# Altium PCB POVRotor.PcbDoc (part 1 of 2)
Units mm, origin at the board's own origin, x right, y up, seen from the top; angles counter-clockwise.
Board outline 195 x 22.6 mm, 2 copper layers (Top Layer, Bottom Layer); 165 components, 228 nets, 837 pads, 84 vias.
Unrouted connection lines stored in the file: 1.
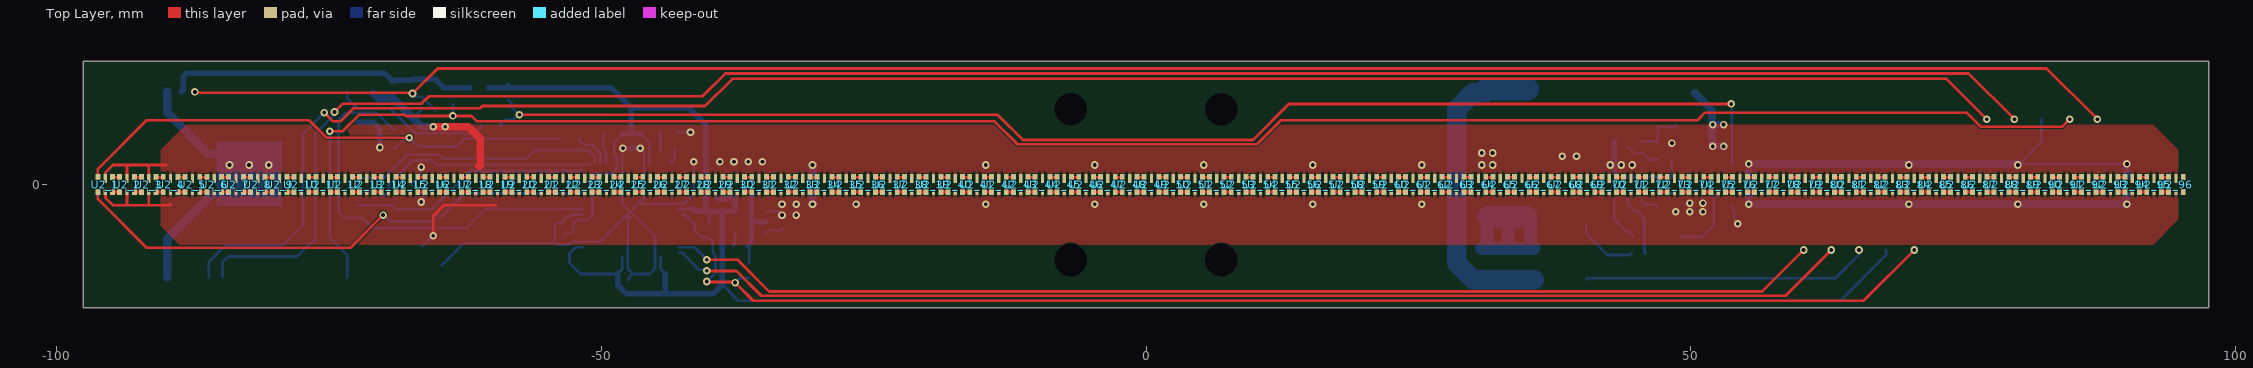
[diagram p0: Top Layer view]
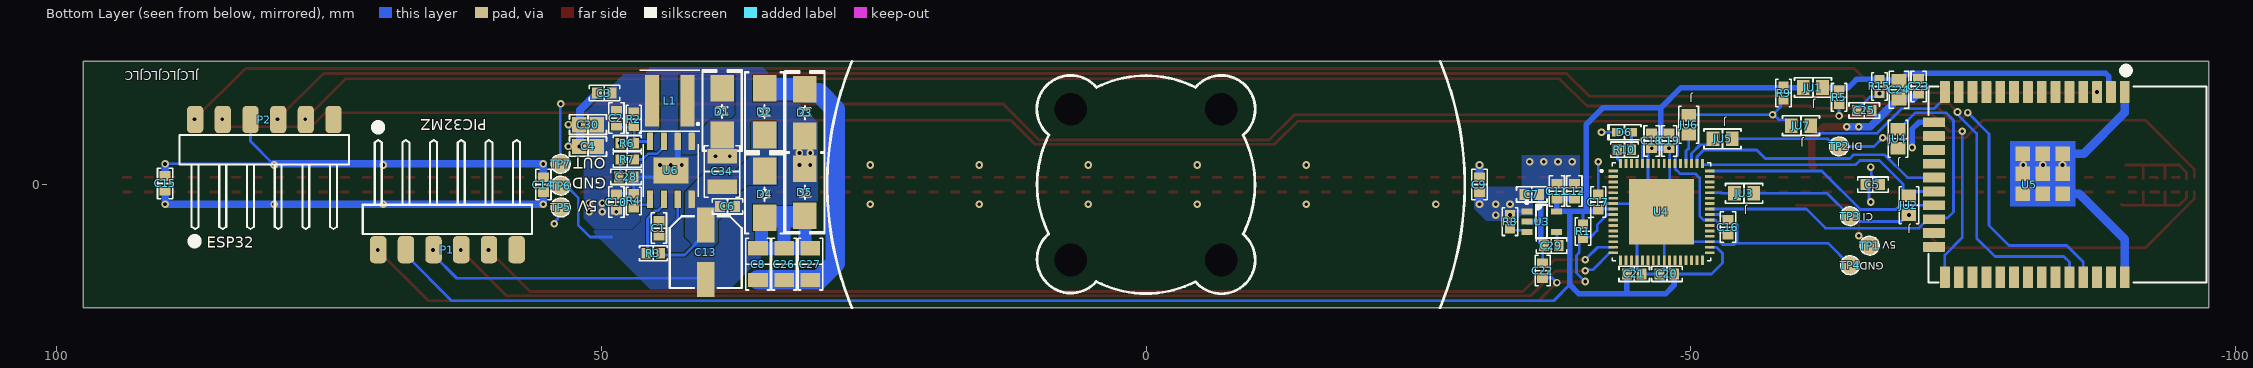
[diagram p1: Bottom Layer view, seen from below]
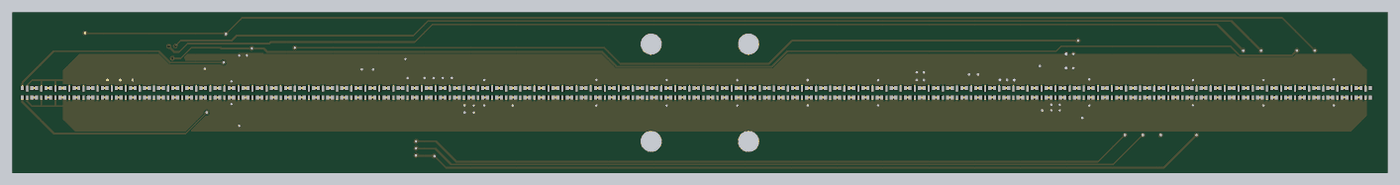
[diagram p3: 3D render of the assembled board from above, using the file's embedded part models]
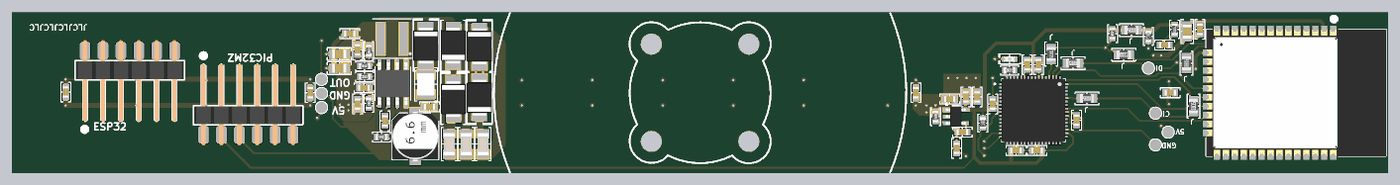
[diagram p4: 3D render of the assembled board from below, using the file's embedded part models]

## Layer stack, top to bottom
Top Solder: solder mask 0.0102, Solder Resist, Dk 3.5
Top Layer: signal copper 0.0356
Dielectric 1: dielectric 0.32, FR-4, Dk 4.8
Bottom Layer: signal copper 0.0356
Bottom Solder: solder mask 0.0102, Solder Resist, Dk 3.5

## Board outline
-97.5,-11.3 97.5,-11.3 97.5,11.3 -97.5,11.3

## Design rules (kind name [scope] priority, off if disabled: settings)
BoardOutlineClearance [All] p1: gap=0.512 ignorepadtopadclearanceinfootprint=FALSE
Clearance [All] p1: gap=0.1 ignorepadtopadclearanceinfootprint=TRUE except(0: Arc-Hole Track-Hole SMDPad-Hole THPad-Hole Via-Hole Fill-Hole Poly-Hole Region-Hole Text-Hole)
PolygonConnect [IsPolygon and not IsNamedPolygon('PolygonDirect')] p1: thpad.connectstyle=Relief thpad.reliefconductorwidth=0.254 thpad.reliefentries=4 thpad.polygonreliefangle="90 Angle" thpad.airgapwidth=0.254 smdpad.connectstyle=Relief smdpad.reliefconductorwidth=0.254 smdpad.reliefentries=4 smdpad.polygonreliefangle="90 Angle" smdpad.airgapwidth=0.254 via.connectstyle=Direct via.reliefconductorwidth=0.254 via.reliefentries=4 via.polygonreliefangle="90 Angle" via.airgapwidth=0.254
PolygonConnect PolygonDirect [(IsNamedPolygon('PolygonDirect'))] p2: connectstyle=Direct reliefconductorwidth=0.254 reliefentries=4 polygonreliefangle="90 Angle" airgapwidth=0.254
RoutingVias [All] p1: holewidth=0.35 width=0.7 viastyle="Through Hole" minholewidth=0.1 minwidth=0.5 maxholewidth=2 maxwidth=2.5
SilkToSilkClearance [All] p1: silktosilkclearance=0.1
SolderMaskExpansion [All] p1: expansion=0.102 istentingtop=FALSE
Width [All] p1: maxlimit=2 minlimit=0.128 preferedwidth=0.254
29 further rules are at their usual default settings.

## Classes and differential pairs
component class U_APA10296: U2_96
component class U_APA10295: U2_95
component class U_APA10294: U2_94
component class U_APA10293: U2_93
component class U_APA10292: U2_92
component class U_APA10291: U2_91
component class U_APA10290: U2_90
component class U_APA10289: U2_89
component class U_APA10288: U2_88
component class U_APA10287: U2_87
component class U_APA10286: U2_86
component class U_APA10285: U2_85
component class U_APA10284: U2_84
component class U_APA10283: U2_83
component class U_APA10282: U2_82
component class U_APA10281: U2_81
component class U_APA10280: U2_80
component class U_APA10279: U2_79
component class U_APA10278: U2_78
component class U_APA10277: U2_77
component class U_APA10276: U2_76
component class U_APA10275: U2_75
channel class APA102: U_APA1021 U_APA1022 U_APA1023 U_APA1024 U_APA1025 U_APA1026 U_APA1027 U_APA1028 U_APA1029 U_APA10210 U_APA10211 U_APA10212 U_APA10213 U_APA10214 U_APA10215 U_APA10216 U_APA10217 U_APA10218 U_APA10219 U_APA10220 U_APA10221 U_APA10222 U_APA10223 U_APA10224 U_APA10225 U_APA10226 U_APA10227 U_APA10228 U_APA10229 U_APA10230 U_APA10231 U_APA10232 U_APA10233 U_APA10234 U_APA10235 U_APA10236 U_APA10237 U_APA10238 U_APA10239 U_APA10240 U_APA10241 U_APA10242 U_APA10243 U_APA10244 U_APA10245 U_APA10246 U_APA10247 U_APA10248 U_APA10249 U_APA10250 U_APA10251 U_APA10252 U_APA10253 U_APA10254 U_APA10255 U_APA10256 U_APA10257 U_APA10258 U_APA10259 U_APA10260 U_APA10261 U_APA10262 U_APA10263 U_APA10264 U_APA10265 U_APA10266 U_APA10267 U_APA10268 U_APA10269 U_APA10270 U_APA10271 U_APA10272 U_APA10273 U_APA10274
component class U_APA10274: U2_74
component class U_APA10273: U2_73
component class U_APA10272: U2_72
component class U_APA10271: U2_71
component class U_APA10270: U2_70
component class U_APA10269: U2_69
component class U_APA10268: U2_68
component class U_APA10267: U2_67
component class U_APA10266: U2_66
component class U_APA10265: U2_65
component class U_APA10264: U2_64
component class U_APA10263: U2_63
component class U_APA10262: U2_62
component class U_APA10261: U2_61
component class U_APA10260: U2_60
component class U_APA10259: U2_59
component class U_APA10258: U2_58
component class U_APA10257: U2_57
component class U_APA10256: U2_56
component class U_APA10255: U2_55
component class U_APA10254: U2_54
component class U_APA10253: U2_53
component class U_APA10252: U2_52
component class U_APA10251: U2_51
component class U_APA10250: U2_50
component class U_APA10249: U2_49
component class U_APA10248: U2_48
component class U_APA10247: U2_47
component class U_APA10246: U2_46
component class U_APA10245: U2_45
component class U_APA10244: U2_44
component class U_APA10243: U2_43
component class U_APA10242: U2_42
component class U_APA10241: U2_41
component class U_APA10240: U2_40
component class U_APA10239: U2_39
component class U_APA10238: U2_38
component class U_APA10237: U2_37
component class U_APA10236: U2_36
component class U_APA10235: U2_35
component class U_APA10234: U2_34
component class U_APA10233: U2_33
component class U_APA10232: U2_32
component class U_APA10231: U2_31
component class U_APA10230: U2_30
component class U_APA10229: U2_29
component class U_APA10228: U2_28
component class U_APA10227: U2_27
component class U_APA10226: U2_26
component class U_APA10225: U2_25
component class U_APA10224: U2_24
component class U_APA10223: U2_23
component class U_APA10222: U2_22
component class U_APA10221: U2_21
component class U_APA10220: U2_20
component class U_APA10219: U2_19
component class U_APA10218: U2_18
component class U_APA10217: U2_17
component class U_APA10216: U2_16
component class U_APA10215: U2_15
component class U_APA10214: U2_14
component class U_APA10213: U2_13
component class U_APA10212: U2_12
component class U_APA10211: U2_11
component class U_APA10210: U2_10
component class U_APA1029: U2_9
component class U_APA1028: U2_8
component class U_APA1027: U2_7
component class U_APA1026: U2_6
component class Top: C1 C2 C3 C4 C5 C6 C7 C8 C9 C10 C11 C12 C13 C14 C15 C16 C17 C18 C19 C20 C21 C22 C26 C27 C28 C29 C30 C34 D1 D2 D3 D4 D5 D6 IC1 JU2 JU3 JU4 JU5 JU6 JU7 L1 P1 R1 R2 R3 R4 R6 R7 R8 R9 R10 TP1 TP2 TP3 TP4 TP5 TP6 TP7 U3 U4 U6
net class DI[2..96]: DI2 DI3 DI4 DI5 DI6 DI7 DI8 DI9 DI10 DI11 DI12 DI13 DI14 DI15 DI16 DI17 DI18 DI19 DI20 DI21 DI22 DI23 DI24 DI25 DI26 DI27 DI28 DI29 DI30 DI31 DI32 DI33 DI34 DI35 DI36 DI37 DI38 DI39 DI40 DI41 DI42 DI43 DI44 DI45 DI46 DI47 DI48 DI49 DI50 DI51 DI52 DI53 DI54 DI55 DI56 DI57 DI58 DI59 DI60 DI61 DI62 DI63 DI64 DI65 DI66 DI67 DI68 DI69 DI70 DI71 DI72 DI73 DI74 DI75 DI76 DI77 DI78 DI79 DI80 DI81 DI82 DI83 DI84 DI85 DI86 DI87 DI88 DI89 DI90 DI91 DI92 DI93 DI94 DI95 DI96
net class CI[2..96]: CI2 CI3 CI4 CI5 CI6 CI7 CI8 CI9 CI10 CI11 CI12 CI13 CI14 CI15 CI16 CI17 CI18 CI19 CI20 CI21 CI22 CI23 CI24 CI25 CI26 CI27 CI28 CI29 CI30 CI31 CI32 CI33 CI34 CI35 CI36 CI37 CI38 CI39 CI40 CI41 CI42 CI43 CI44 CI45 CI46 CI47 CI48 CI49 CI50 CI51 CI52 CI53 CI54 CI55 CI56 CI57 CI58 CI59 CI60 CI61 CI62 CI63 CI64 CI65 CI66 CI67 CI68 CI69 CI70 CI71 CI72 CI73 CI74 CI75 CI76 CI77 CI78 CI79 CI80 CI81 CI82 CI83 CI84 CI85 CI86 CI87 CI88 CI89 CI90 CI91 CI92 CI93 CI94 CI95 CI96
component class U_APA1025: U2_5
component class U_APA1024: U2_4
component class U_APA1023: U2_3
component class U_APA1022: U2_2
component class U_APA1021: U2_1
component class U_ESP32: C23 C24 C25 JU1 P2 R5 R15 U5

## Components (designator, comment, footprint, x,y, rotation, side; value= is the part's Value field where it differs from the comment)
C1 "1µF" "CAP 0603_1608" 44.7,-4 r90 bottom
C2 "47pF" "CAP 0603_1608" 48.6,6.1 r270 bottom
C3 "1µF" "CAP 0603_1608" 49.7,8.4 r180 bottom
C4 "22µF" "CAP 0805_2012" 51.2,3.5 r180 bottom
C5 "0.1µF" "CAP 0603_1608" -66.7,0 r180 bottom
C6 "0.1µF" "CAP 0603_1608" 38.4,-2 r180 bottom
C7 "1µF" "CAP 0603_1608" -35.4,-0.9 r0 bottom
C8 "Resonance" "CAP 1206_3216 - 1.8MM" 35.6,-7.3 r270 bottom
C9 "0.1µF" "CAP 0603_1608" -30.6,0 r90 bottom
C10 "0.1µF" "CAP 0603_1608" 48.6,-1.6 r90 bottom
C11 "0.1µF" "CAP 0603_1608" -37.7,-0.6 r90 bottom
C12 "1µF" "CAP 0603_1608" -39.3,-0.6 r270 bottom
C13 "47µF" "CAP ALSMD 6.6MM H6.1MM" 40.4,-6.2 r270 bottom
C14 "0.1µF" "CAP 0603_1608" 55.3,0 r90 bottom
C15 "0.1µF" "CAP 0603_1608" 90,0.1 r90 bottom
C16 "0.1µF" "CAP 0603_1608" -53.4,-3.9 r90 bottom
C17 "0.1µF" "CAP 0603_1608" -41.5,-1.6 r90 bottom
C18 "0.1µF" "CAP 0603_1608" -46.4,4 r270 bottom
C19 "0.1µF" "CAP 0603_1608" -48,4 r270 bottom
C20 "0.1µF" "CAP 0603_1608" -47.8,-8.2 r0 bottom
C21 "0.1µF" "CAP 0603_1608" -44.8,-8.2 r180 bottom
C22 "0.1µF" "CAP 0603_1608" -36.4,-7.9 r90 bottom
C23 "0.1µF" "CAP 0603_1608" -70.9,9 r270 bottom
C24 "22µF" "CAP 0805_2012" -69.1,8.7 r90 bottom
C25 "0.1µF" "CAP 0603_1608" -65.9,6.8 r180 bottom
C26 "Resonance" "CAP 1206_3216 - 1.8MM" 33.2,-7.3 r270 bottom
C27 "Resonance" "CAP 1206_3216 - 1.8MM" 30.8,-7.3 r270 bottom
C28 "6.8nF" "CAP 0603_1608" 47.7,0.7 r180 bottom
C29 "10nF" "CAP 0603_1608" -37.2,-5.6 r0 bottom
C30 "22µF" "CAP 0805_2012" 51.2,5.5 r180 bottom
C34 "10µF" "CAP 1210_3225 - 2.8MM" 38.9,1.2 r90 bottom
D1 "STPS340UY" "DO214AA SMB" 38.9,6.7 r90 bottom
D2 "STPS340UY" "DO214AA SMB" 35,6.7 r270 bottom
D3 "STPS340UY" "DO214AA SMB" 31.3,6.6 r90 bottom
D4 "STPS340UY" "DO214AA SMB" 35,-0.9 r90 bottom
D5 "STPS340UY" "DO214AA SMB" 31.3,-0.7 r270 bottom
D6 "Blue" "LED 0603_1608 GREEN" -43.9,4.8 r0 bottom value=Green
JU1 "Value" "RES 0805_2012" -61.2,8.9 r0 bottom
JU2 "=Value" "RES 0805_2012" -70,-1.9 r90 bottom
JU3 "=Value" "RES 0805_2012" -54.875,-0.8 r0 bottom
JU4 "=Value" "RES 0805_2012" -69,4.2 r90 bottom
JU5 "=Value" "RES 0805_2012" -52.9,4.2 r0 bottom
JU6 "=Value" "RES 0805_2012" -49.8,5.5 r270 bottom
JU7 "=Value" "RES 0805_2012" -60.1,5.4 r180 bottom
L1 "MPL-AL5050-5R6" MPL-AL5050-5R6 43.7,7.7 r0 bottom
P1 "61300611021" 61300611021 64.1,-3.2 r180 bottom
P2 "61300611021" 61300611021 80.9,3.2 r0 bottom
R1 "10 kOhms" "RES 0603_1608" -40.1,-4.3 r90 bottom
R2 "3 K" "RES 0603_1608" 47,6 r90 bottom value="3 k"
R3 "10 k" "RES 0603_1608" 45.2,-6.3 r180 bottom
R4 "47 K" "RES 0603_1608" 47,-1.5 r90 bottom value="47 k"
R5 "10 kOhms" "RES 0603_1608" -63.6,8 r270 bottom
R6 "0.75 K" "RES 0603_1608" 47.6,3.8 r180 bottom
R7 "62 K" "RES 0603_1608" 47.6,2.3 r0 bottom value="62 k"
R8 "10 k" "RES 0603_1608" -33.4,-3.4 r90 bottom
R9 "10 kOhms" "RES 0603_1608" -58.5,8.4 r90 bottom
R10 "1 kOhms" "RES 0603_1608" -43.9,3.2 r180 bottom
R15 "10 kOhms" "RES 0603_1608" -67.3,9 r90 bottom
TP1 "TP" TP -66.4,-5.6 r180 bottom
TP2 "TP" TP -63.6,3.5 r180 bottom
TP3 "TP" TP -64.6,-2.9 r90 bottom
TP4 "TP" TP -64.6,-7.4 r180 bottom
TP5 "TP" TP 53.7,-2.1 r270 bottom
TP6 "TP" TP 53.7,-0.1 r270 bottom
TP7 "TP" TP 53.7,1.9 r270 bottom
U2_1 "APA 102 2020" LED_APA-102-1515 -95.5,0 r180 top (schematic designator U2)
U2_2 "APA 102 2020" LED_APA-102-1515 -93.5,0 r180 top (schematic designator U2)
U2_3 "APA 102 2020" LED_APA-102-1515 -91.5,0 r180 top (schematic designator U2)
U2_4 "APA 102 2020" LED_APA-102-1515 -89.5,0 r180 top (schematic designator U2)
U2_5 "APA 102 2020" LED_APA-102-1515 -87.5,0 r180 top (schematic designator U2)
U2_6 "APA 102 2020" LED_APA-102-1515 -85.5,0 r180 top (schematic designator U2)
U2_7 "APA 102 2020" LED_APA-102-1515 -83.5,0 r180 top (schematic designator U2)
U2_8 "APA 102 2020" LED_APA-102-1515 -81.5,0 r180 top (schematic designator U2)
U2_9 "APA 102 2020" LED_APA-102-1515 -79.5,0 r180 top (schematic designator U2)
U2_10 "APA 102 2020" LED_APA-102-1515 -77.5,0 r180 top (schematic designator U2)
U2_11 "APA 102 2020" LED_APA-102-1515 -75.5,0 r180 top (schematic designator U2)
U2_12 "APA 102 2020" LED_APA-102-1515 -73.5,0 r180 top (schematic designator U2)
U2_13 "APA 102 2020" LED_APA-102-1515 -71.5,0 r180 top (schematic designator U2)
U2_14 "APA 102 2020" LED_APA-102-1515 -69.5,0 r180 top (schematic designator U2)
U2_15 "APA 102 2020" LED_APA-102-1515 -67.5,0 r180 top (schematic designator U2)
U2_16 "APA 102 2020" LED_APA-102-1515 -65.5,0 r180 top (schematic designator U2)
U2_17 "APA 102 2020" LED_APA-102-1515 -63.5,0 r180 top (schematic designator U2)
U2_18 "APA 102 2020" LED_APA-102-1515 -61.5,0 r180 top (schematic designator U2)
U2_19 "APA 102 2020" LED_APA-102-1515 -59.5,0 r180 top (schematic designator U2)
U2_20 "APA 102 2020" LED_APA-102-1515 -57.5,0 r180 top (schematic designator U2)
U2_21 "APA 102 2020" LED_APA-102-1515 -55.5,0 r180 top (schematic designator U2)
U2_22 "APA 102 2020" LED_APA-102-1515 -53.5,0 r180 top (schematic designator U2)
U2_23 "APA 102 2020" LED_APA-102-1515 -51.5,0 r180 top (schematic designator U2)
U2_24 "APA 102 2020" LED_APA-102-1515 -49.5,0 r180 top (schematic designator U2)
U2_25 "APA 102 2020" LED_APA-102-1515 -47.5,0 r180 top (schematic designator U2)
U2_26 "APA 102 2020" LED_APA-102-1515 -45.5,0 r180 top (schematic designator U2)
U2_27 "APA 102 2020" LED_APA-102-1515 -43.5,0 r180 top (schematic designator U2)
U2_28 "APA 102 2020" LED_APA-102-1515 -41.5,0 r180 top (schematic designator U2)
U2_29 "APA 102 2020" LED_APA-102-1515 -39.5,0 r180 top (schematic designator U2)
U2_30 "APA 102 2020" LED_APA-102-1515 -37.5,0 r180 top (schematic designator U2)
U2_31 "APA 102 2020" LED_APA-102-1515 -35.5,0 r180 top (schematic designator U2)
U2_32 "APA 102 2020" LED_APA-102-1515 -33.5,0 r180 top (schematic designator U2)
U2_33 "APA 102 2020" LED_APA-102-1515 -31.5,0 r180 top (schematic designator U2)
U2_34 "APA 102 2020" LED_APA-102-1515 -29.5,0 r180 top (schematic designator U2)
U2_35 "APA 102 2020" LED_APA-102-1515 -27.5,0 r180 top (schematic designator U2)
U2_36 "APA 102 2020" LED_APA-102-1515 -25.5,0 r180 top (schematic designator U2)
U2_37 "APA 102 2020" LED_APA-102-1515 -23.5,0 r180 top (schematic designator U2)
U2_38 "APA 102 2020" LED_APA-102-1515 -21.5,0 r180 top (schematic designator U2)
U2_39 "APA 102 2020" LED_APA-102-1515 -19.5,0 r180 top (schematic designator U2)
U2_40 "APA 102 2020" LED_APA-102-1515 -17.5,0 r180 top (schematic designator U2)
U2_41 "APA 102 2020" LED_APA-102-1515 -15.5,0 r180 top (schematic designator U2)
U2_42 "APA 102 2020" LED_APA-102-1515 -13.5,0 r180 top (schematic designator U2)
U2_43 "APA 102 2020" LED_APA-102-1515 -11.5,0 r180 top (schematic designator U2)
U2_44 "APA 102 2020" LED_APA-102-1515 -9.5,0 r180 top (schematic designator U2)
U2_45 "APA 102 2020" LED_APA-102-1515 -7.5,0 r180 top (schematic designator U2)
U2_46 "APA 102 2020" LED_APA-102-1515 -5.5,0 r180 top (schematic designator U2)
U2_47 "APA 102 2020" LED_APA-102-1515 -3.5,0 r180 top (schematic designator U2)
U2_48 "APA 102 2020" LED_APA-102-1515 -1.5,0 r180 top (schematic designator U2)
U2_49 "APA 102 2020" LED_APA-102-1515 0.5,0 r180 top (schematic designator U2)
U2_50 "APA 102 2020" LED_APA-102-1515 2.5,0 r180 top (schematic designator U2)
U2_51 "APA 102 2020" LED_APA-102-1515 4.5,0 r180 top (schematic designator U2)
U2_52 "APA 102 2020" LED_APA-102-1515 6.5,0 r180 top (schematic designator U2)
U2_53 "APA 102 2020" LED_APA-102-1515 8.5,0 r180 top (schematic designator U2)
U2_54 "APA 102 2020" LED_APA-102-1515 10.5,0 r180 top (schematic designator U2)
U2_55 "APA 102 2020" LED_APA-102-1515 12.5,0 r180 top (schematic designator U2)
U2_56 "APA 102 2020" LED_APA-102-1515 14.5,0 r180 top (schematic designator U2)
U2_57 "APA 102 2020" LED_APA-102-1515 16.5,0 r180 top (schematic designator U2)
U2_58 "APA 102 2020" LED_APA-102-1515 18.5,0 r180 top (schematic designator U2)
U2_59 "APA 102 2020" LED_APA-102-1515 20.5,0 r180 top (schematic designator U2)
U2_60 "APA 102 2020" LED_APA-102-1515 22.5,0 r180 top (schematic designator U2)
U2_61 "APA 102 2020" LED_APA-102-1515 24.5,0 r180 top (schematic designator U2)
U2_62 "APA 102 2020" LED_APA-102-1515 26.5,0 r180 top (schematic designator U2)
U2_63 "APA 102 2020" LED_APA-102-1515 28.5,0 r180 top (schematic designator U2)
U2_64 "APA 102 2020" LED_APA-102-1515 30.5,0 r180 top (schematic designator U2)
U2_65 "APA 102 2020" LED_APA-102-1515 32.5,0 r180 top (schematic designator U2)
U2_66 "APA 102 2020" LED_APA-102-1515 34.5,0 r180 top (schematic designator U2)
U2_67 "APA 102 2020" LED_APA-102-1515 36.5,0 r180 top (schematic designator U2)
U2_68 "APA 102 2020" LED_APA-102-1515 38.5,0 r180 top (schematic designator U2)
U2_69 "APA 102 2020" LED_APA-102-1515 40.5,0 r180 top (schematic designator U2)
U2_70 "APA 102 2020" LED_APA-102-1515 42.5,0 r180 top (schematic designator U2)
U2_71 "APA 102 2020" LED_APA-102-1515 44.5,0 r180 top (schematic designator U2)
U2_72 "APA 102 2020" LED_APA-102-1515 46.5,0 r180 top (schematic designator U2)
U2_73 "APA 102 2020" LED_APA-102-1515 48.5,0 r180 top (schematic designator U2)
U2_74 "APA 102 2020" LED_APA-102-1515 50.5,0 r180 top (schematic designator U2)
U2_75 "APA 102 2020" LED_APA-102-1515 52.5,0 r180 top (schematic designator U2)
U2_76 "APA 102 2020" LED_APA-102-1515 54.5,0 r180 top (schematic designator U2)
U2_77 "APA 102 2020" LED_APA-102-1515 56.5,0 r180 top (schematic designator U2)
U2_78 "APA 102 2020" LED_APA-102-1515 58.5,0 r180 top (schematic designator U2)
U2_79 "APA 102 2020" LED_APA-102-1515 60.5,0 r180 top (schematic designator U2)
U2_80 "APA 102 2020" LED_APA-102-1515 62.5,0 r180 top (schematic designator U2)
U2_81 "APA 102 2020" LED_APA-102-1515 64.5,0 r180 top (schematic designator U2)
U2_82 "APA 102 2020" LED_APA-102-1515 66.5,0 r180 top (schematic designator U2)
U2_83 "APA 102 2020" LED_APA-102-1515 68.5,0 r180 top (schematic designator U2)
U2_84 "APA 102 2020" LED_APA-102-1515 70.5,0 r180 top (schematic designator U2)
U2_85 "APA 102 2020" LED_APA-102-1515 72.5,0 r180 top (schematic designator U2)
U2_86 "APA 102 2020" LED_APA-102-1515 74.5,0 r180 top (schematic designator U2)
U2_87 "APA 102 2020" LED_APA-102-1515 76.5,0 r180 top (schematic designator U2)
U2_88 "APA 102 2020" LED_APA-102-1515 78.5,0 r180 top (schematic designator U2)
U2_89 "APA 102 2020" LED_APA-102-1515 80.5,0 r180 top (schematic designator U2)
U2_90 "APA 102 2020" LED_APA-102-1515 82.5,0 r180 top (schematic designator U2)
U2_91 "APA 102 2020" LED_APA-102-1515 84.5,0 r180 top (schematic designator U2)
U2_92 "APA 102 2020" LED_APA-102-1515 86.5,0 r180 top (schematic designator U2)
U2_93 "APA 102 2020" LED_APA-102-1515 88.5,0 r180 top (schematic designator U2)
U2_94 "APA 102 2020" LED_APA-102-1515 90.5,0 r180 top (schematic designator U2)
U2_95 "APA 102 2020" LED_APA-102-1515 92.5,0 r180 top (schematic designator U2)
U2_96 "APA 102 2020" LED_APA-102-1515 94.5,0 r180 top (schematic designator U2)
U3 "3.3V LDO" "TI SOT-23-5 DBV" -36.3,-3.4 r180 bottom
U4 "PIC32MZ0512EFE064" QFN50P900X900X100-65N -47.3,-2.5 r180 bottom
U5 "ESP32" "Espressif ESP32-WROOM-32" -82.3,0 r270 bottom
U6 "BD9G500EFJ" SOP127P600X100-9N 43.6,1.3 r270 bottom

## Footprints (in the part's own frame and the unit in brackets; to place one, negate y for a bottom-side part, rotate by r counter-clockwise, add the part's x,y. Pads: shape width x height; smd on the part's side, far side on the other; paste and mask are expansions set on the pad)
61300611021 [mm] "Pin Header, pitch 2.54 mm, THT, Angled, single row, 6p"
  rrect50% 1.5x2.5 smd: 1(6.35,-2.77) 2(3.81,-2.77) 3(1.27,-2.77) 4(-1.27,-2.77) 5(-3.81,-2.77) 6(-6.35,-2.77)
  silkscreen extent -7.77,-1.35 7.77,7.27, body extent -7.62,-4.27 7.62,7.27, height 2.57
"CAP 0603_1608" [mm] "Chip Capacitor, 2-Leads, Body 1.60x0.80mm, IPC Medium Density"
  rect 0.9x1 smd: 1(-0.675,0) 2(0.675,0)
  silkscreen extent -1.4,-0.7 1.4,0.7, body extent -0.8,-0.41 0.8,0.41, height 0.82
"CAP 0805_2012" [mm] "Chip Capacitor, 2-Leads, Body 2.00x1.20mm, IPC Medium Density"
  rect 1.3x1.4 smd: 1(-0.8,0) 2(0.8,0)
  silkscreen extent -1.7,-0.9 1.7,0.9, body extent -1,-0.64 1,0.64, height 1.26
"CAP 1206_3216 - 1.8MM" [mm] "Chip Capacitor, 2-Leads, Body 3.25x1.60mm, IPC Medium Density"
  rect 1.3x1.8 smd: 1(-1.45,0) 2(1.45,0)
  silkscreen extent -2.37,-1.12 2.37,1.12, body extent -1.6,-0.8 1.6,0.8, height 1.8
"CAP 1210_3225 - 2.8MM" [mm] "Chip Capacitor, 2-Leads, Body 3.20x2.50mm, IPC Medium Density"
  rect 1.3x2.7 smd: 1(-1.4,0) 2(1.4,0)
  silkscreen extent -2.37,-1.63 2.37,1.63, body extent -1.6,-1.25 1.6,1.25, height 2.8
"CAP ALSMD 6.6MM H6.1MM" [mm] "Aluminum Electrolytic Capacitor, Body 6.60x6.60x6.10mm, IPC Low Density"
  rect 3.2x1.6 smd: 1(-2.5,0) 2(2.5,0)
  silkscreen extent -3.3,-3.3 3.3,3.3, body extent -3.5,-3.3 3.5,3.3, height 6.1
"DO214AA SMB" [mm] "Molded Diode, 2-Leads, Body 4.31x3.62mm, IPC Medium Density"
  rect 2.45x2.15 smd: 1(-2.15,0) 2(2.15,0)
  silkscreen extent -3.6,-1.8 3.8,1.8, body extent -2.6,-1.8 2.6,1.8, height 2.4
"Espressif ESP32-WROOM-32" [mm] "39-SMD Module"
  rrect10% 2x0.9 smd paste+0 mask+0.05: 1(-8.5,7.51) 2(-8.5,6.24) 3(-8.5,4.97) 4(-8.5,3.7) 5(-8.5,2.43) 6(-8.5,1.16) 7(-8.5,-0.11) 8(-8.5,-1.38) 9(-8.5,-2.65) 10(-8.5,-3.92) 11(-8.5,-5.19) 12(-8.5,-6.46) 13(-8.5,-7.73) 14(-8.5,-9) 25(8.5,-9) 26(8.5,-7.73) 27(8.5,-6.46) 28(8.5,-5.19) 29(8.5,-3.92) 30(8.5,-2.65)
  rrect10% 0.9x2 smd paste+0 mask+0.05: 15(-5.715,-10) 16(-4.445,-10) 17(-3.175,-10) 18(-1.905,-10) 19(-0.635,-10) 20(0.635,-10) 21(1.905,-10) 22(3.175,-10) 23(4.445,-10) 24(5.715,-10)
  rect 2x0.9 smd paste+0 mask+0.05: 31(8.5,-1.38) 32(8.5,-0.11) 33(8.5,1.16) 34(8.5,2.43) 35(8.5,3.7) 36(8.5,4.97) 37(8.5,6.24) 38(8.5,7.51)
  rect 1.33x1.33 smd paste+0 mask+0.05: 39(-2.835,-1.835) 39(-2.835,0) 39(-2.835,1.835) 39(-1,0) 39(-1,-1.835) 39(-1,1.835) 39(0.835,-1.835) 39(0.835,0) 39(0.835,1.835)
  Top Layer region: -4.001,3 1.999,3 1.999,-3 -4.001,-3
  silkscreen extent -10.71,-10.5 9,15, body extent -9,-10.5 9,15, height 3.2
"LED 0603_1608 GREEN" [mm] "Chip Diode, 2-Leads, Body 1.60x0.80mm, IPC Medium Density"
  rect 0.8x0.8 smd: 1(-0.75,0) 2(0.75,0)
  silkscreen extent -1.52,-0.7 1.52,0.7, body extent -0.8,-0.4 0.8,0.4, height 0.53
LED_APA-102-1515 [mm]
  rect 0.3x0.8 smd: 1(0,-0.55)
  rect 0.45x0.55 smd: 2(-0.675,-0.675) 3(-0.675,0.675) 5(0.675,0.675) 6(0.675,-0.675)
  rect 0.3x0.55 smd: 4(0,0.675)
  body extent -0.8,-0.8 0.8,0.8, height 0.9
MPL-AL5050-5R6 [mm]
  rect 1.25x4.7 smd: 1(-1.625,0) 2(1.625,0)
  silkscreen extent -2.75,-2.8 2.75,2.8, body extent -2.75,-2.65 2.75,2.65, height 4.8
QFN50P900X900X100-65N [mm]
  rect 0.86x0.26 smd: 1(-4.435,3.75) 2(-4.435,3.25) 3(-4.435,2.75) 4(-4.435,2.25) 5(-4.435,1.75) 6(-4.435,1.25) 7(-4.435,0.75) 8(-4.435,0.25) 9(-4.435,-0.25) 10(-4.435,-0.75) 11(-4.435,-1.25) 12(-4.435,-1.75) 13(-4.435,-2.25) 14(-4.435,-2.75) 15(-4.435,-3.25) 16(-4.435,-3.75) 33(4.435,-3.75) 34(4.435,-3.25) 35(4.435,-2.75) 36(4.435,-2.25) 37(4.435,-1.75) 38(4.435,-1.25) 39(4.435,-0.75) 40(4.435,-0.25) 41(4.435,0.25) 42(4.435,0.75) 43(4.435,1.25) 44(4.435,1.75) 45(4.435,2.25) 46(4.435,2.75) 47(4.435,3.25) 48(4.435,3.75)
  rect 0.26x0.86 smd: 17(-3.75,-4.435) 18(-3.25,-4.435) 19(-2.75,-4.435) 20(-2.25,-4.435) 21(-1.75,-4.435) 22(-1.25,-4.435) 23(-0.75,-4.435) 24(-0.25,-4.435) 25(0.25,-4.435) 26(0.75,-4.435) 27(1.25,-4.435) 28(1.75,-4.435) 29(2.25,-4.435) 30(2.75,-4.435) 31(3.25,-4.435) 32(3.75,-4.435) 49(3.75,4.435) 50(3.25,4.435) 51(2.75,4.435) 52(2.25,4.435) 53(1.75,4.435) 54(1.25,4.435) 55(0.75,4.435) 56(0.25,4.435) 57(-0.25,4.435) 58(-0.75,4.435) 59(-1.25,4.435) 60(-1.75,4.435) 61(-2.25,4.435) 62(-2.75,4.435) 63(-3.25,4.435) 64(-3.75,4.435)
  rect 6x6 smd: 65(0,0)
  silkscreen extent -5.6,-4.5 4.5,4.5, body extent -4.52,-4.52 4.52,4.52, height 0.9
"RES 0603_1608" [mm] "Chip Resistor, 2-Leads, Body 1.60x0.80mm, IPC Medium Density"
  rect 0.85x0.95 smd: 1(-0.65,0) 2(0.65,0)
  silkscreen extent -1.27,-0.7 1.27,0.7, body extent -0.8,-0.4 0.8,0.4, height 0.45
"RES 0805_2012" [mm] "Chip Resistor, 2-Leads, Body 2.00x1.25mm, IPC Medium Density"
  rect 1.15x1.35 smd: 1(-0.875,0) 2(0.875,0)
  silkscreen extent -1.7,-0.9 1.7,0.9, body extent -1,-0.62 1,0.63, height 0.6
SOP127P600X100-9N [mm]
  rrect25% 1.61x0.58 smd: 1(-2.655,1.905) 2(-2.655,0.635) 3(-2.655,-0.635) 4(-2.655,-1.905) 5(2.655,-1.905) 6(2.655,-0.635) 7(2.655,0.635) 8(2.655,1.905)
  rect 2.4x3.2 smd paste-3: 9(0,0)
  silkscreen extent -4.36,-2.51 2.4,2.58, body extent -3,-2.45 3,2.45, height 1
"TI SOT-23-5 DBV" [mm] "SOT23, 5-Leads, Body 2.90x2.80mm, Pitch 0.95mm, IPC Medium Density"
  rect 1x0.55 smd: 1(-1.35,0.95) 2(-1.35,0) 3(-1.35,-0.95) 4(1.35,-0.95) 5(1.35,0.95)
  silkscreen extent -1.48,-1.55 0.5,1.9, body extent -1.44,-1.42 1.39,1.48, height 1.5
TP [mm]
  round 1.75 smd: 1(0,0)
  silkscreen extent -0.87,-0.87 0.87,0.87

## Part data
C1 C3 C7 C12: library part GCJ188R71E105KA01D, "CAP CER 1UF 25V X7R 0603", Device Package="0603 (1608 Metric)", Manufacturer="Murata Electronics", Operating Temperature="-55°C ~ 125°C", Ratings=AEC-Q200, Supplier Part Number 1=490-14409-1-ND, Temperature Coefficient=X7R, Tolerance=±10%, Applications="Automotive, Boardflex Sensitive", Capacitance=1µF, ComponentLink1Description=Datasheet, ComponentLink1URL=https://search.murata.co.jp/Ceramy/image/img/A01X/G101/ENG/GCJ188R71E105KA01-01.pdf, ComponentLink2Description="DigiKey Link", ComponentLink2URL=http://digikey.com/product-detail/en/murata-electronics/GCJ188R71E105KA01D/490-14409-1-ND/6606870, Features="Soft Termination", LastUpdated="13-Aug-20 10:24:06 AM", Lifecycle Status=Active, Minimum Order=1, Mounting Type="Surface Mount, MLCC", Package / Case="0603 (1608 Metric)", Packaging=TapeAndReel, Part Number=GCJ188R71E105KA01D, Part Status=Active, PartId=9566, Price=0.05, Series=GCJ, Size / Dimension="0.063\" L x 0.031\" W (1.60mm x 0.80mm)", Supplier 1=DigiKey, Thickness (Max)="0.035\" (0.90mm)"
C2: library part C1608NP02A470J080AA, "CAP CER 47PF 100V NP0 0603", Device Package="0603 (1608 Metric)", Manufacturer="TDK Corporation", Operating Temperature="-55°C ~ 150°C", Supplier Part Number 1=445-14125-1-ND, Temperature Coefficient="C0G, NP0", Tolerance=±5%, Applications="General Purpose", Capacitance=47pF, ComponentLink1Description=Datasheet, ComponentLink1URL=https://product.tdk.com/info/en/catalog/datasheets/mlcc_commercial_hightemp_en.pdf?ref_disty=digikey, ComponentLink2Description="DigiKey Link", ComponentLink2URL=http://digikey.com/product-detail/en/tdk-corporation/C1608NP02A470J080AA/445-14125-1-ND/3955791, Features="High Temperature", LastUpdated="13-Aug-20 10:25:18 AM", Lifecycle Status=Active, Minimum Order=1, Mounting Type="Surface Mount, MLCC", Package / Case="0603 (1608 Metric)", Packaging=TapeAndReel, Part Number=C1608NP02A470J080AA, Part Status=Active, PartId=7049, Price=0.04, Series=C, Size / Dimension="0.063\" L x 0.031\" W (1.60mm x 0.80mm)", Supplier 1=DigiKey, Thickness (Max)="0.035\" (0.90mm)"
C4 C24 C30: library part CL21A226MOQNNNE, "CAP CER 22UF 16V X5R 0805", Device Package="0805 (2012 Metric)", Manufacturer="Samsung Electro-Mechanics", Operating Temperature="-55°C ~ 85°C", Supplier Part Number 1=1276-2909-1-ND, Temperature Coefficient=X5R, Tolerance=±20%, Voltage - Rated=16V, Applications="General Purpose", Capacitance=22µF, ComponentLink1Description=Datasheet, ComponentLink1URL=http://www.samsungsem.com/kr/support/product-search/mlcc/CL21A226MOQNNNE.jsp, ComponentLink2Description="DigiKey Link", ComponentLink2URL=http://digikey.com/product-detail/en/samsung-electro-mechanics/CL21A226MOQNNNE/1276-2909-1-ND/3890995, LastUpdated="21-Jan-20 12:03:05 AM", Lifecycle Status=Active, Minimum Order=1, Mounting Type="Surface Mount, MLCC", Package / Case="0805 (2012 Metric)", Packaging=TapeAndReel, Part Number=CL21A226MOQNNNE, Part Status=Active, PartId=3052, Price=0.11, Series=CL, Size / Dimension="0.079\" L x 0.049\" W (2.00mm x 1.25mm)", Supplier 1=DigiKey, Thickness (Max)="0.055\" (1.40mm)"
C5 C6 C9 C10 C11 C14 C15 C16 C17 C18 C19 C20 C21 C22 C23 C25: library part GCG188R92A104KA03D, "CAP CER 0.1UF 100V 0603 EPOXY", Device Package="0603 (1608 Metric)", Manufacturer="Murata Electronics", Operating Temperature="-55°C ~ 150°C", Ratings=AEC-Q200, Supplier Part Number 1=490-18197-1-ND, Temperature Coefficient=X8R, Tolerance=±10%, Voltage - Rated=100V, Applications=Automotive, Capacitance=0.1µF, ComponentLink1Description=Datasheet, ComponentLink1URL=https://search.murata.co.jp/Ceramy/image/img/A01X/G101/ENG/GCG188R92A104KA03-01.pdf, ComponentLink2Description="DigiKey Link", ComponentLink2URL=http://digikey.com/product-detail/en/murata-electronics/GCG188R92A104KA03D/490-18197-1-ND/9867926, Features="Epoxy Mountable", LastUpdated="21-Jan-20 12:01:59 AM", Lifecycle Status=Active, Minimum Order=1, Mounting Type="Surface Mount, MLCC, Epoxy", Package / Case="0603 (1608 Metric)", Packaging=TapeAndReel, Part Number=GCG188R92A104KA03D, Part Status=Active, PartId=9025, Price=0.07, Series=GCG, Size / Dimension="0.063\" L x 0.031\" W (1.60mm x 0.80mm)", Supplier 1=DigiKey, Thickness (Max)="0.035\" (0.90mm)"
C8 C26 C27: library part HMF316B7103KFHT, "CAP, MLCC, 1206/3216, 100V, X7R,", Capacitance=10000pF, Device Package="1206 (3216 Metric)", Manufacturer="Taiyo Yuden", Operating Temperature="-55°C ~ 125°C", Ratings=AEC-Q200, Supplier Part Number 1=587-6513-1-ND, Temperature Coefficient=X7R, Tolerance=±10%, Voltage - Rated=100V, Applications="Automotive, SMPS Filtering", ComponentLink1Description=Datasheet, ComponentLink1URL=https://ds.yuden.co.jp/TYCOMPAS/ut/detail?pn=HMF316B7103KFHT&u=M, ComponentLink2Description="DigiKey Link", ComponentLink2URL=http://digikey.com/product-detail/en/taiyo-yuden/HMF316B7103KFHT/587-6513-1-ND/10379206, LastUpdated="9/2/2020 1:05:22 AM", Lifecycle Status=Active, Minimum Order=1, Mounting Type="Surface Mount, MLCC", Package / Case="1206 (3216 Metric)", Packaging=TapeAndReel, Part Number=HMF316B7103KFHT, Part Status=Active, PartId=22763, Price=0.10, Series=M, Size / Dimension="0.126\" L x 0.063\" W (3.20mm x 1.60mm)", Supplier 1=DigiKey, Thickness (Max)="0.049\" (1.25mm)"
C13: library part EMHL160ARA470MF61G, "ALUMINUM CAPACITOR", Device Package="Radial, Can - SMD", ESR (Equivalent Series Resistance)="1.2Ohm @ 100kHz", Lifetime @ Temp.="2000 Hrs @ 125°C", Manufacturer="United Chemi-Con", Operating Temperature="-40°C ~ 125°C", Ratings=AEC-Q200, Ripple Current @ High Frequency="110mA @ 100kHz", Ripple Current @ Low Frequency="102.3mA @ 120Hz", Supplier Part Number 1=565-EMHL160ARA470MF61GCT-ND, Tolerance=±20%, Voltage - Rated=16V, Applications=Automotive, Capacitance=47µF, ComponentLink1Description=Datasheet, ComponentLink1URL=http://www.chemi-con.co.jp/cgi-bin/CAT_DB/SEARCH/cat_db_al.cgi?e=e&j=p&pdfname=mhl, ComponentLink2Description="DigiKey Link", ComponentLink2URL=http://digikey.com/product-detail/en/united-chemi-con/EMHL160ARA470MF61G/565-EMHL160ARA470MF61GCT-ND/10487181, Height - Seated (Max)="0.240\" (6.10mm)", LastUpdated="9/2/2020 1:25:27 AM", Lifecycle Status=Active, Minimum Order=1, Mounting Type="Surface Mount", Package / Case="Radial, Can - SMD", Packaging=TapeAndReel, Part Number=EMHL160ARA470MF61G, Part Status=Active, PartId=8133, Polarization=Polar, Price=0.15, Series="AIchip™- MHL", Size / Dimension="0.248\" Dia (6.30mm)", Supplier 1=DigiKey, Surface Mount Land Size="0.260\" L x 0.260\" W (6.60mm x 6.60mm)"
C28 C29: library part GCG188R92A104KA03D, "CAP CER 0.1UF 100V 0603 EPOXY", Capacitance=0.1µF, Device Package="0603 (1608 Metric)", Manufacturer="Murata Electronics", Operating Temperature="-55°C ~ 150°C", Ratings=AEC-Q200, Supplier Part Number 1=490-18197-1-ND, Temperature Coefficient=X8R, Tolerance=±10%, Voltage - Rated=100V, Applications=Automotive, ComponentLink1Description=Datasheet, ComponentLink1URL=https://search.murata.co.jp/Ceramy/image/img/A01X/G101/ENG/GCG188R92A104KA03-01.pdf, ComponentLink2Description="DigiKey Link", ComponentLink2URL=http://digikey.com/product-detail/en/murata-electronics/GCG188R92A104KA03D/490-18197-1-ND/9867926, Features="Epoxy Mountable", LastUpdated="21-Jan-20 12:01:59 AM", Lifecycle Status=Active, Minimum Order=1, Mounting Type="Surface Mount, MLCC, Epoxy", Package / Case="0603 (1608 Metric)", Packaging=TapeAndReel, Part Number=GCG188R92A104KA03D, Part Status=Active, PartId=9025, Price=0.07, Series=GCG, Size / Dimension="0.063\" L x 0.031\" W (1.60mm x 0.80mm)", Supplier 1=DigiKey, Thickness (Max)="0.035\" (0.90mm)"
C34: library part EMK325ABJ107MM-P, "CAP CER 100UF 16V X5R 1210", Capacitance=100µF, Device Package=1210, Manufacturer="Taiyo Yuden", Operating Temperature="-55°C ~ 85°C", Package / Case="1210 (3225 Metric)", Supplier Part Number 1=587-5426-1-ND, Temperature Coefficient=X5R, Tolerance=±20%, Voltage - Rated=16V, Applications="General Purpose", ComponentLink1Description=Datasheet, ComponentLink1URL="https://ds.yuden.co.jp/TYCOMPAS/ut/detail?pn=EMK325ABJ107MM-P &u=M", ComponentLink2Description="DigiKey Link", ComponentLink2URL=http://digikey.com/product-detail/en/taiyo-yuden/EMK325ABJ107MM-P/587-5426-1-ND/7067102, LastUpdated="21-Jan-20 12:30:21 AM", Lifecycle Status=Active, Minimum Order=1, Mounting Type="Surface Mount, MLCC", Packaging=TapeAndReel, Part Number=EMK325ABJ107MM-P, Part Status=Active, PartId=24141, Price=0.71, Series=M, Size / Dimension="0.126\" L x 0.098\" W (3.20mm x 2.50mm)", Supplier 1=DigiKey, Thickness (Max)="0.110\" (2.80mm)"
D1 D2 D3 D4 D5: "DIODE SCHOTTKY 40V 3A SMB", Current - Average Rectified (Io)=3A, Current - Reverse Leakage @ Vr="20µA @ 40V", Manufacturer=STMicroelectronics, Operating Temperature - Junction="-40°C ~ 150°C", Package / Case="DO-214AA, SMB", Supplier Device Package=SMB, Supplier Part Number 1=497-13432-1-ND, Voltage - DC Reverse (Vr) (Max)=40V, Voltage - Forward (Vf) (Max) @ If="630mV @ 3A", ComponentLink1Description=Datasheet, ComponentLink1URL=http://www.st.com/content/ccc/resource/technical/document/datasheet/9d/f4/fa/9f/2c/39/45/91/CD00270569.pdf/files/CD00270569.pdf/jcr:content/translations/en.CD00270569.pdf, ComponentLink2Description="DigiKey Link", ComponentLink2URL=http://digikey.com/product-detail/en/stmicroelectronics/STPS340UY/497-13432-1-ND/3770079, Diode Type=Schottky, LastUpdated="9/2/2020 1:18:53 AM", Lifecycle Status=Active, Minimum Order=1, Mounting Type="Surface Mount", Packaging=TapeAndReel, Part Number=STPS340UY, Part Status=Active, PartId=1402, Price=0.30, Series="Automotive, AEC-Q101", Speed="Fast Recovery =< 500ns, > 200mA (Io)", Supplier 1=DigiKey
D6: library part XZCDGK53W-8VF, "Blue LED", Color=Green, Current - Test=2mA, Device Package="0603 (1608 Metric)", Lens Color=Colorless, Manufacturer=SunLED, Millicandela Rating=417mcd, Supplier Device Package=2-SMD, Supplier Part Number 1=1497-XZCDGK53W-8VFCT-ND, Voltage - Forward (Vf) (Typ)=2.65V, ComponentLink1Description=Datasheet, ComponentLink1URL=https://www.sunledusa.com/products/spec/XZCDGK53W-8VF.pdf, ComponentLink2Description="DigiKey Link", ComponentLink2URL=http://digikey.com/product-detail/en/sunled/XZCDGK53W-8VF/1497-XZCDGK53W-8VFCT-ND/10449792, Configuration=Independent, Height (Max)=1.10mm, LastUpdated="21-Jan-20 3:12:09 AM", Lens Size="0.35mm Dia", Lens Style="Round with Domed Top", Lens Transparency=Clear, Lifecycle Status=Active, Minimum Order=1, Mounting Type="Surface Mount", Package / Case="0603 (1608 Metric)", Packaging=Unknown, Part Number=XZCDGK53W-8VF, Part Status=Active, PartId=938, Price=0.18, Series="Ultra Low Current", Size / Dimension="1.60mm L x 0.80mm W", Supplier 1=DigiKey, Viewing Angle=60°, Wavelength - Dominant=525nm, Wavelength - Peak=515nm
JU1 JU2 JU3 JU4 JU5 JU6 JU7: library part TLRZ2ATTD, "Jumper", Device Package="0805 (2012 Metric)", Manufacturer="KOA Speer Electronics, Inc.", Operating Temperature="-55°C ~ 170°C", Ratings=AEC-Q200, Supplier Device Package=0805, Supplier Part Number 1=2019-TLRZ2ATTDCT-ND, ComponentLink1Description=Datasheet, ComponentLink1URL=http://www.koaspeer.com/catimages/Products/TLRZ/TLRZ.pdf, ComponentLink2Description="DigiKey Link", ComponentLink2URL=http://digikey.com/product-detail/en/koa-speer-electronics-inc/TLRZ2ATTD/2019-TLRZ2ATTDCT-ND/9847538, Composition="Metal Element", Features="Automotive AEC-Q200, Current Sense", Height - Seated (Max)="0.022\" (0.55mm)", LastUpdated="9/2/2020 1:15:24 AM", Lifecycle Status=Active, Minimum Order=1, Number of Terminations=2, Package / Case="0805 (2012 Metric)", Packaging=TapeAndReel, Part Number=TLRZ2ATTD, Part Status=Active, PartId=27685, Price=0.09, Series=TLRZ, Size / Dimension="0.079\" L x 0.049\" W (2.00mm x 1.25mm)", Supplier 1=DigiKey, Tolerance=Jumper
L1: "FIXED IND 5.6UH 6.8A 20 MOHM SMD", Package="Molded-2 Laird", Availability="In Stock", Check_prices=https://www.snapeda.com/parts/MGV05021R0M-10/Laird/view-part/5881352/?ref=eda, MF="Laird-Signal Integrity Products", MP=MGV05021R0M-10, Price=None, Purchase-URL=https://pricing.snapeda.com/search/part/MGV05021R0M-10/?ref=eda, SnapEDA_Link=https://www.snapeda.com/parts/MGV05021R0M-10/Laird/view-part/5881352/?ref=snap
P1 P2: library part "6pin right angle header - no holes", "WR-PHD Pin Header, THT, pitch 2.54mm, Single Row, Angled, 6p", Contact Resistance=20mOhm, Manufacturer="Wurth Elektronik", Operating Temperature="-40 to +105degC", Rated Current=3A, Withstanding Voltage=500VAC, Working Voltage=250VAC, ComponentLink1Description=Manufacturer, ComponentLink1URL=http://www.we-online.de, ComponentLink2Description=Datasheet, ComponentLink2URL=https://www.we-online.com/catalog/datasheet/61300611021.pdf, Gender="Pin Header", Manufacturer Part Number=61300611021, Mounting Technology=THT, Orientation=Angled, Packaging=Bag, Pin Number=6, Pitch=2.54mm, Published Date="May 2020", Row Number=Single
R1 R5 R9 R15: library part RNCS0603BKE10K0, "RES 10K OHM 0.1% 1/16W 0603", Device Package="0603 (1608 Metric)", Manufacturer="Stackpole Electronics Inc", Operating Temperature="-55°C ~ 155°C", Power (Watts)="0.063W, 1/16W", Ratings=AEC-Q200, Supplier Device Package=0603, Supplier Part Number 1=RNCS0603BKE10K0CT-ND, Temperature Coefficient=±25ppm/°C, Tolerance=±0.1%, ComponentLink1Description=Datasheet, ComponentLink1URL=https://www.seielect.com/catalog/sei-rncs_rnch.pdf, ComponentLink2Description="DigiKey Link", ComponentLink2URL=http://digikey.com/product-detail/en/stackpole-electronics-inc/RNCS0603BKE10K0/RNCS0603BKE10K0CT-ND/1800113, Composition="Thin Film", Features="Anti-Corrosive, Automotive AEC-Q200, Moisture Resistant", Height - Seated (Max)="0.022\" (0.55mm)", Lifecycle Status=Active, Minimum Order=1, Number of Terminations=2, Package / Case="0603 (1608 Metric)", Packaging=TapeAndReel, Part Number=RNCS0603BKE10K0, Part Status=Active, PartId=4838, Price=0.08, Resistance="10 kOhms", Series=RNCS, Size / Dimension="0.061\" L x 0.031\" W (1.55mm x 0.80mm)", Supplier 1=DigiKey
  R1 R9: LastUpdated="13-Aug-20 10:37:13 AM"
  R5 R15: LastUpdated="21-Jan-20 12:25:01 AM"
R2: library part RT0603DRD0740K2L, "RES SMD 40.2KOHM 0.5% 1/10W 0603", Device Package="0603 (1608 Metric)", Manufacturer=Yageo, Operating Temperature="-55°C ~ 155°C", Power (Watts)="0.1W, 1/10W", Resistance="40.2 kOhms", Supplier Device Package=0603, Supplier Part Number 1=311-40.2KDCT-ND, Temperature Coefficient=±25ppm/°C, Tolerance=±0.5%, ComponentLink1Description=Datasheet, ComponentLink1URL=https://www.yageo.com/upload/media/product/productsearch/datasheet/rchip/PYu-RT_1-to-0.01_RoHS_L_11.pdf, ComponentLink2Description="DigiKey Link", ComponentLink2URL=http://digikey.com/product-detail/en/yageo/RT0603DRD0740K2L/311-40.2KDCT-ND/1035817, Composition="Thin Film", Height - Seated (Max)="0.022\" (0.55mm)", LastUpdated="13-Aug-20 10:36:48 AM", Lifecycle Status=Active, Minimum Order=1, Number of Terminations=2, Package / Case="0603 (1608 Metric)", Packaging=TapeAndReel, Part Number=RT0603DRD0740K2L, Part Status=Active, PartId=18076, Price=0.02, Series=RT, Size / Dimension="0.063\" L x 0.031\" W (1.60mm x 0.80mm)", Supplier 1=DigiKey
R3 R4 R7 R8: library part RNCS0603BKE10K0, "RES 10K OHM 0.1% 1/16W 0603", Device Package="0603 (1608 Metric)", Manufacturer="Stackpole Electronics Inc", Operating Temperature="-55°C ~ 155°C", Power (Watts)="0.063W, 1/16W", Ratings=AEC-Q200, Resistance="10 kOhms", Supplier Device Package=0603, Supplier Part Number 1=RNCS0603BKE10K0CT-ND, Temperature Coefficient=±25ppm/°C, Tolerance=±0.1%, ComponentLink1Description=Datasheet, ComponentLink1URL=https://www.seielect.com/catalog/sei-rncs_rnch.pdf, ComponentLink2Description="DigiKey Link", ComponentLink2URL=http://digikey.com/product-detail/en/stackpole-electronics-inc/RNCS0603BKE10K0/RNCS0603BKE10K0CT-ND/1800113, Composition="Thin Film", Features="Anti-Corrosive, Automotive AEC-Q200, Moisture Resistant", Height - Seated (Max)="0.022\" (0.55mm)", LastUpdated="21-Jan-20 12:25:01 AM", Lifecycle Status=Active, Minimum Order=1, Number of Terminations=2, Package / Case="0603 (1608 Metric)", Packaging=TapeAndReel, Part Number=RNCS0603BKE10K0, Part Status=Active, PartId=4838, Price=0.08, Series=RNCS, Size / Dimension="0.061\" L x 0.031\" W (1.55mm x 0.80mm)", Supplier 1=DigiKey
R6: library part RMCF0603FT7K68, "RES 7.68K OHM 1% 1/10W 0603", Device Package="0603 (1608 Metric)", Manufacturer="Stackpole Electronics Inc", Operating Temperature="-55°C ~ 155°C", Power (Watts)="0.1W, 1/10W", Ratings=AEC-Q200, Resistance="7.68 kOhms", Supplier Device Package=0603, Supplier Part Number 1=RMCF0603FT7K68CT-ND, Temperature Coefficient=±100ppm/°C, Tolerance=±1%, ComponentLink1Description=Datasheet, ComponentLink1URL=https://www.seielect.com/catalog/sei-rmcf_rmcp.pdf, ComponentLink2Description="DigiKey Link", ComponentLink2URL=http://digikey.com/product-detail/en/stackpole-electronics-inc/RMCF0603FT7K68/RMCF0603FT7K68CT-ND/4425120, Composition="Thick Film", Features="Automotive AEC-Q200", Height - Seated (Max)="0.022\" (0.55mm)", LastUpdated="13-Aug-20 10:36:44 AM", Lifecycle Status=Active, Minimum Order=1, Number of Terminations=2, Package / Case="0603 (1608 Metric)", Packaging=CutTape, Part Number=RMCF0603FT7K68, Part Status=Active, PartId=20370, Price=0.10, Series=RMCF, Size / Dimension="0.061\" L x 0.031\" W (1.55mm x 0.80mm)", Supplier 1=DigiKey
R10: library part RNCF0603DTE1K00, "RES 1K OHM 0.5% 1/10W 0603", Device Package="0603 (1608 Metric)", Manufacturer="Stackpole Electronics Inc", Operating Temperature="-55°C ~ 155°C", Power (Watts)="0.1W, 1/10W", Ratings=AEC-Q200, Supplier Device Package=0603, Supplier Part Number 1=RNCF0603DTE1K00CT-ND, Temperature Coefficient=±25ppm/°C, Tolerance=±0.5%, ComponentLink1Description=Datasheet, ComponentLink1URL=https://www.seielect.com/catalog/sei-rncf.pdf, ComponentLink2Description="DigiKey Link", ComponentLink2URL=http://digikey.com/product-detail/en/stackpole-electronics-inc/RNCF0603DTE1K00/RNCF0603DTE1K00CT-ND/9915086, Composition="Thin Film", Features="Automotive AEC-Q200", Height - Seated (Max)="0.022\" (0.55mm)", LastUpdated="21-Jan-20 12:14:28 AM", Lifecycle Status=Active, Minimum Order=1, Number of Terminations=2, Package / Case="0603 (1608 Metric)", Packaging=TapeAndReel, Part Number=RNCF0603DTE1K00, Part Status=Active, PartId=26300, Price=0.05, Resistance="1 kOhms", Series=RNCF, Size / Dimension="0.061\" L x 0.031\" W (1.55mm x 0.80mm)", Supplier 1=DigiKey
TP1 TP2 TP3 TP4 TP5 TP6 TP7: "Test point"
U2_1 U2_2 U2_3 U2_4 U2_5 U2_6 U2_7 U2_8 U2_9 U2_10 U2_11 U2_12 U2_13 U2_14 U2_15 U2_16 U2_17 U2_18 U2_19 U2_20 U2_21 U2_22 U2_23 U2_24 U2_25 U2_26 U2_27 U2_28 U2_29 U2_30 U2_31 U2_32 U2_33 U2_34 U2_35 U2_36 U2_37 U2_38 U2_39 U2_40 U2_41 U2_42 U2_43 U2_44 U2_45 U2_46 U2_47 U2_48 U2_49 U2_50 U2_51 U2_52 U2_53 U2_54 U2_55 U2_56 U2_57 U2_58 U2_59 U2_60 U2_61 U2_62 U2_63 U2_64 U2_65 U2_66 U2_67 U2_68 U2_69 U2_70 U2_71 U2_72 U2_73 U2_74 U2_75 U2_76 U2_77 U2_78 U2_79 U2_80 U2_81 U2_82 U2_83 U2_84 U2_85 U2_86 U2_87 U2_88 U2_89 U2_90 U2_91 U2_92 U2_93 U2_94 U2_95 U2_96: library part APA-102-1515, "8-pin type LED three-color RGB Dimming control", Package="SMD-8 iPixel LED Light Co.", Availability=Unavailable, MF="iPixel LED Light Co.", MP=APA-102-2020-256-8, Price=None, SnapEDA_Link=https://www.snapeda.com/parts/APA-102-2020-256-8/iPixel%20LED%20Light%20Co./view-part/698331/?ref=snap
U3: library part MIC5504-3.3YM5
U4: library part PIC32MZ0512EFE064-I/PT, "32-bit Microcontrollers - MCU 32-BIT MCU 512KB FL 128KB RAM, No Crypto", Package="TQFP-64 Microchip", Availability=Unavailable, MF=Microchip, MP=PIC32MZ2048EFG064T-I/PT, Price=None, SnapEDA_Link=https://www.snapeda.com/parts/PIC32MZ2048EFG064T-I/PT/Microchip/view-part/565997/?ref=snap
U6: "5A Buck"

## Free pads (board coordinates)
  oval 0x1.524 hole 3: 2(-6.915,-6.915) 2(-6.915,6.915) 2(6.915,6.915) 2(6.915,-6.915)

## Via types
v1: diameter 0.7, hole 0.35, Top Layer to Bottom Layer, tented both sides, 84 vias

## Nets (pads, with @x,y where several pads share a name; then routed paths per layer and width w, separated by ;. In a path a pad name is that pad's centre, name@x,y a point inside that pad or via, vN(x,y) a via of type N, cw(c..) or ccw(c..) an arc to the next point about the centre after c; other vN are vias at no path point)
3V3: C11.1 C12.2 C16.1 C17.1 C18.1 C19.1 C20.1 C21.1 JU1.2 P1.5 R1.2 R9.2 U3.5 U4.8 U4.19 U4.26 U4.34 U4.39 U4.54 U4.60 | length 199.1
  Bottom Layer w0.254: C16.1@-53.4,-4.575 -53.193,-4.368 -52.668,-4.368 -52.5,-4.2 -52.5,-3.5 -52.253,-3.253 U4.39@-51.738,-3.253 ; U4.34@-51.735,-5.75 -51.738,-5.753 -52.353,-5.753 -52.9,-6.3 -52.9,-7.2 -51.9,-8.2 C20.1@-48.475,-8.2 -48.475,-8.15 -48.05,-7.725 U4.26@-48.05,-6.935 -48.05,-6.635 U4.26@-48.053,-6.632 ; U4.39@-51.735,-3.25 -51.732,-3.247 -51.147,-3.247 -50.8,-2.9 -50.8,0.6 -50.4,1 -49,1 -48.553,1.447 -48.553,1.932 U4.54@-48.55,1.935 -48.553,1.938 -48.553,2.453 -48.8,2.7 -48.8,3.925 -48.05,4.675 C19.1@-48,4.675 ; C18.1@-46.4,4.675 -46.35,4.675 -45.55,3.875 U4.60@-45.55,1.935 U4.60@-45.547,1.932 ; U4.19@-44.547,-6.632 -44.55,-6.635 U4.19@-44.55,-6.935 -44.55,-7.725 -44.125,-8.15 C21.1@-44.125,-8.2 ; U4.8@-42.865,-2.25 -41.525,-2.25 C17.1@-41.5,-2.275 ; R1.2@-40.1,-3.65 -40.1,-2.45 ; -38.885,-9.185 -37.41,-10.661 63.719,-10.661 67.9,-6.48 P1.5@67.9,-6 ; U3.5@-37.671,-2.429 U3.5@-37.65,-2.45
  Bottom Layer w0.512: JU1.2@-60.325,8.9 R9.2@-58.5,8.9 ; R9.2@-58.5,9.05 R9.2@-58.5,8.9 ; C20.1@-48.475,-8.2 -48.475,-9.225 -47.7,-10 -39.7,-10 -38.885,-9.185 -38.885,-2.45 ; C19.1@-48,4.675 -47.3,4.675 ; C18.1@-46.4,4.675 -47.3,4.675 ; -44.125,-9.7 C21.1@-44.125,-8.2 ; C17.1@-41.5,-2.275 -41.325,-2.45 -40.4,-2.45 ; C12.2@-39.3,-1.275 C11.1@-37.7,-1.275 -37.671,-1.275 U3.5@-37.671,-2.429 ; U3.5@-37.671,-2.45 -38.885,-2.45 ; R9.2@-58.5,8.9 -49.1,8.9 -47.251,7.051 ; -47.3,4.675 -47.251,4.724 -47.251,7.051 ; -47.251,7.051 -41.951,7.051 -40.4,5.5 -40.4,-2.45 ; -40.4,-2.45 -40.1,-2.45 -38.885,-2.45
5V: C2.1 C3.2 C4.2 C5.1 C7.2 C9.1 C10.1 C14.1 C15.1 C30.2 L1.2 R2.2 R8.2 TP1.1 TP5.1 U2_1.4 U2_2.4 U2_3.4 U2_4.4 U2_5.4 U2_6.4 U2_7.4 U2_8.4 U2_9.4 U2_10.4 U2_11.4 U2_12.4 U2_13.4 U2_14.4 U2_15.4 U2_16.4 U2_17.4 U2_18.4 U2_19.4 U2_20.4 U2_21.4 U2_22.4 U2_23.4 U2_24.4 U2_25.4 U2_26.4 U2_27.4 U2_28.4 U2_29.4 U2_30.4 U2_31.4 U2_32.4 U2_33.4 U2_34.4 U2_35.4 U2_36.4 U2_37.4 U2_38.4 U2_39.4 U2_40.4 U2_41.4 U2_42.4 U2_43.4 U2_44.4 U2_45.4 U2_46.4 U2_47.4 U2_48.4 U2_49.4 U2_50.4 U2_51.4 U2_52.4 U2_53.4 U2_54.4 U2_55.4 U2_56.4 U2_57.4 U2_58.4 U2_59.4 U2_60.4 U2_61.4 U2_62.4 U2_63.4 U2_64.4 U2_65.4 U2_66.4 U2_67.4 U2_68.4 U2_69.4 U2_70.4 U2_71.4 U2_72.4 U2_73.4 U2_74.4 U2_75.4 U2_76.4 U2_77.4 U2_78.4 U2_79.4 U2_80.4 U2_81.4 U2_82.4 U2_83.4 U2_84.4 U2_85.4 U2_86.4 U2_87.4 U2_88.4 U2_89.4 U2_90.4 U2_91.4 U2_92.4 U2_93.4 U2_94.4 U2_95.4 U2_96.4 U3.1 | length 61.9
  Top Layer w0.254: U2_1.4@-95.5,-0.675 -95.477,-0.698 -95.477,-1.223 -94.8,-1.9 -93.5,-1.9 ; U2_2.4@-93.5,-0.675 -93.5,-1.9 ; U2_3.4@-91.5,-0.675 -91.5,-1.9 ; -89.5,-1.8 -89.6,-1.9 -91.5,-1.9 ; v1(-65.4,-4.7) -65.4,-2.9 -64.4,-1.9 -59.7,-1.9 ; -93.5,-1.9 -91.5,-1.9
  Bottom Layer w0.254: v1(-66.5,-1.6) -66.5,-1.479 -66.348,-1.327 -66.348,-0.323 C5.1@-66.025,0 ; TP1.1@-66.4,-5.6 -66.35,-5.6 -65.45,-4.7 v1(-65.4,-4.7) ; U3.1@-34.848,-2.452 -33.698,-2.452 R8.2@-33.4,-2.75 v1(-33.4,-2.8) ; TP5.1@53.7,-2.1 53.986,-2.386 53.986,-3.166 54.3,-3.479 v1(54.3,-3.6)
  Bottom Layer w0.7: v1(-30.6,-1.8) C9.1@-30.6,-0.675 ; C14.1@55.3,-0.675 v1(55.3,-1.8) v1(70,-1.8) v1(80,-1.8) v1(90,-1.8) C15.1@90,-0.575
  other v1: -32.1,-2.8 48.6,-2.5 49.9,-2.5 51.1,-2.5 -33.4,-1.8 -32.1,-1.8 -26.6,-1.8 -14.7,-1.8 -4.7,-1.8 5.3,-1.8 15.3,-1.8 25.3,-1.8 49.9,-1.7 51.1,-1.7
C\S\: U4.50 U5.19 | length 24
  Bottom Layer w0.254: U5.19@-72.3,0.635 -69.865,0.635 -67.769,2.731 -64.931,2.731 -64.598,2.398 -56.818,2.398 -56.039,3.177 -51.177,3.177 -50.553,2.553 -50.553,1.938 U4.50@-50.55,1.935
CI1: JU2.1 JU3.1 TP3.1 U2_1.5 | length 45.5
  Top Layer w0.254: U2_1.5@-96.175,-0.675 -96.175,-1.331 -91.706,-5.8 -73,-5.8 v1(-70,-2.8)
  Bottom Layer w0.254: v1(-70,-2.8) -69.875,-2.8 -69.452,-3.223 -69.452,-3.251 -69.303,-3.4 -65.497,-3.4 -64.997,-2.9 -64.725,-2.9 TP3.1@-64.6,-2.9 -62.5,-0.8 JU3.1@-55.75,-0.8
CI2: U2_1.3 U2_2.5 | length 0.6
  Top Layer w0.254: U2_1.3@-94.8,-0.7 -94.775,-0.675 U2_2.5@-94.175,-0.675
CI3: U2_2.3 U2_3.5 | length 0.7
  Top Layer w0.254: U2_2.3@-92.9,-0.7 -92.875,-0.675 U2_2.3@-92.825,-0.675 U2_3.5@-92.175,-0.675
CI4: U2_3.3 U2_4.5 | length 0.6
  Top Layer w0.254: U2_3.3@-90.825,-0.675 U2_4.5@-90.175,-0.675
CI5: U2_4.3 U2_5.5 | length 0.7
  Top Layer w0.254: U2_4.3@-88.825,-0.675 U2_5.5@-88.175,-0.675
CI6: U2_5.3 U2_6.5 | length 0.7
  Top Layer w0.254: U2_5.3@-86.825,-0.675 U2_6.5@-86.175,-0.675
CI7: U2_6.3 U2_7.5 | length 0.7
  Top Layer w0.254: U2_6.3@-84.825,-0.675 -84.2,-0.675 U2_7.5@-84.2,-0.6